# Altium PCB smartmcu_pcb.PcbDoc
Units mil, origin at the board's own origin, x right, y up, seen from the top; angles counter-clockwise.
Board outline 2104 x 1902 mil, 4 copper layers (Top Layer, GND_layer, 3.3V_layer, Bottom Layer), stack 23.756 mil thick; 89 components, 43 nets, 257 pads, 84 vias.
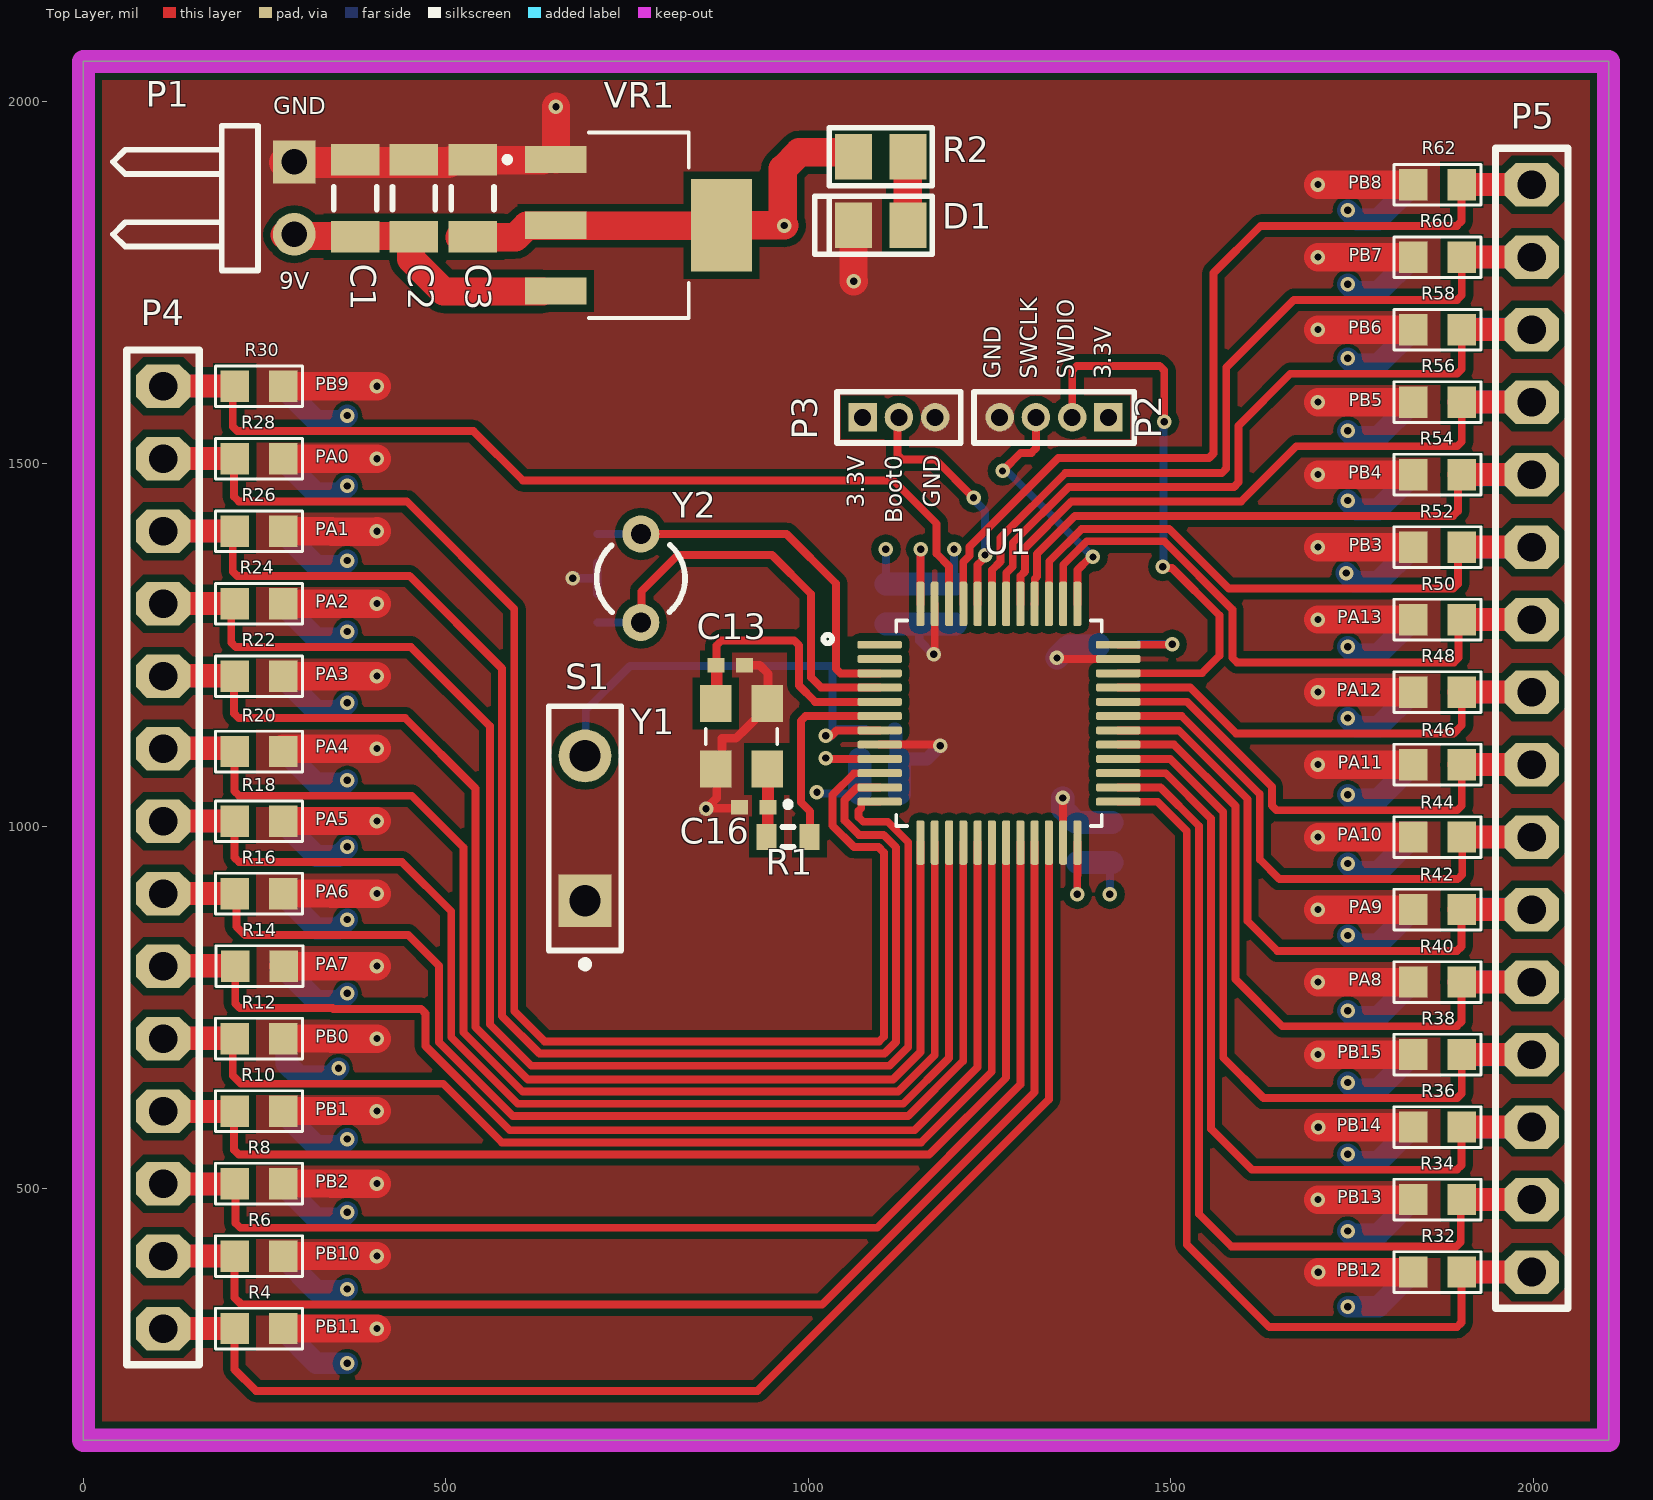
[diagram p0: Top Layer view]
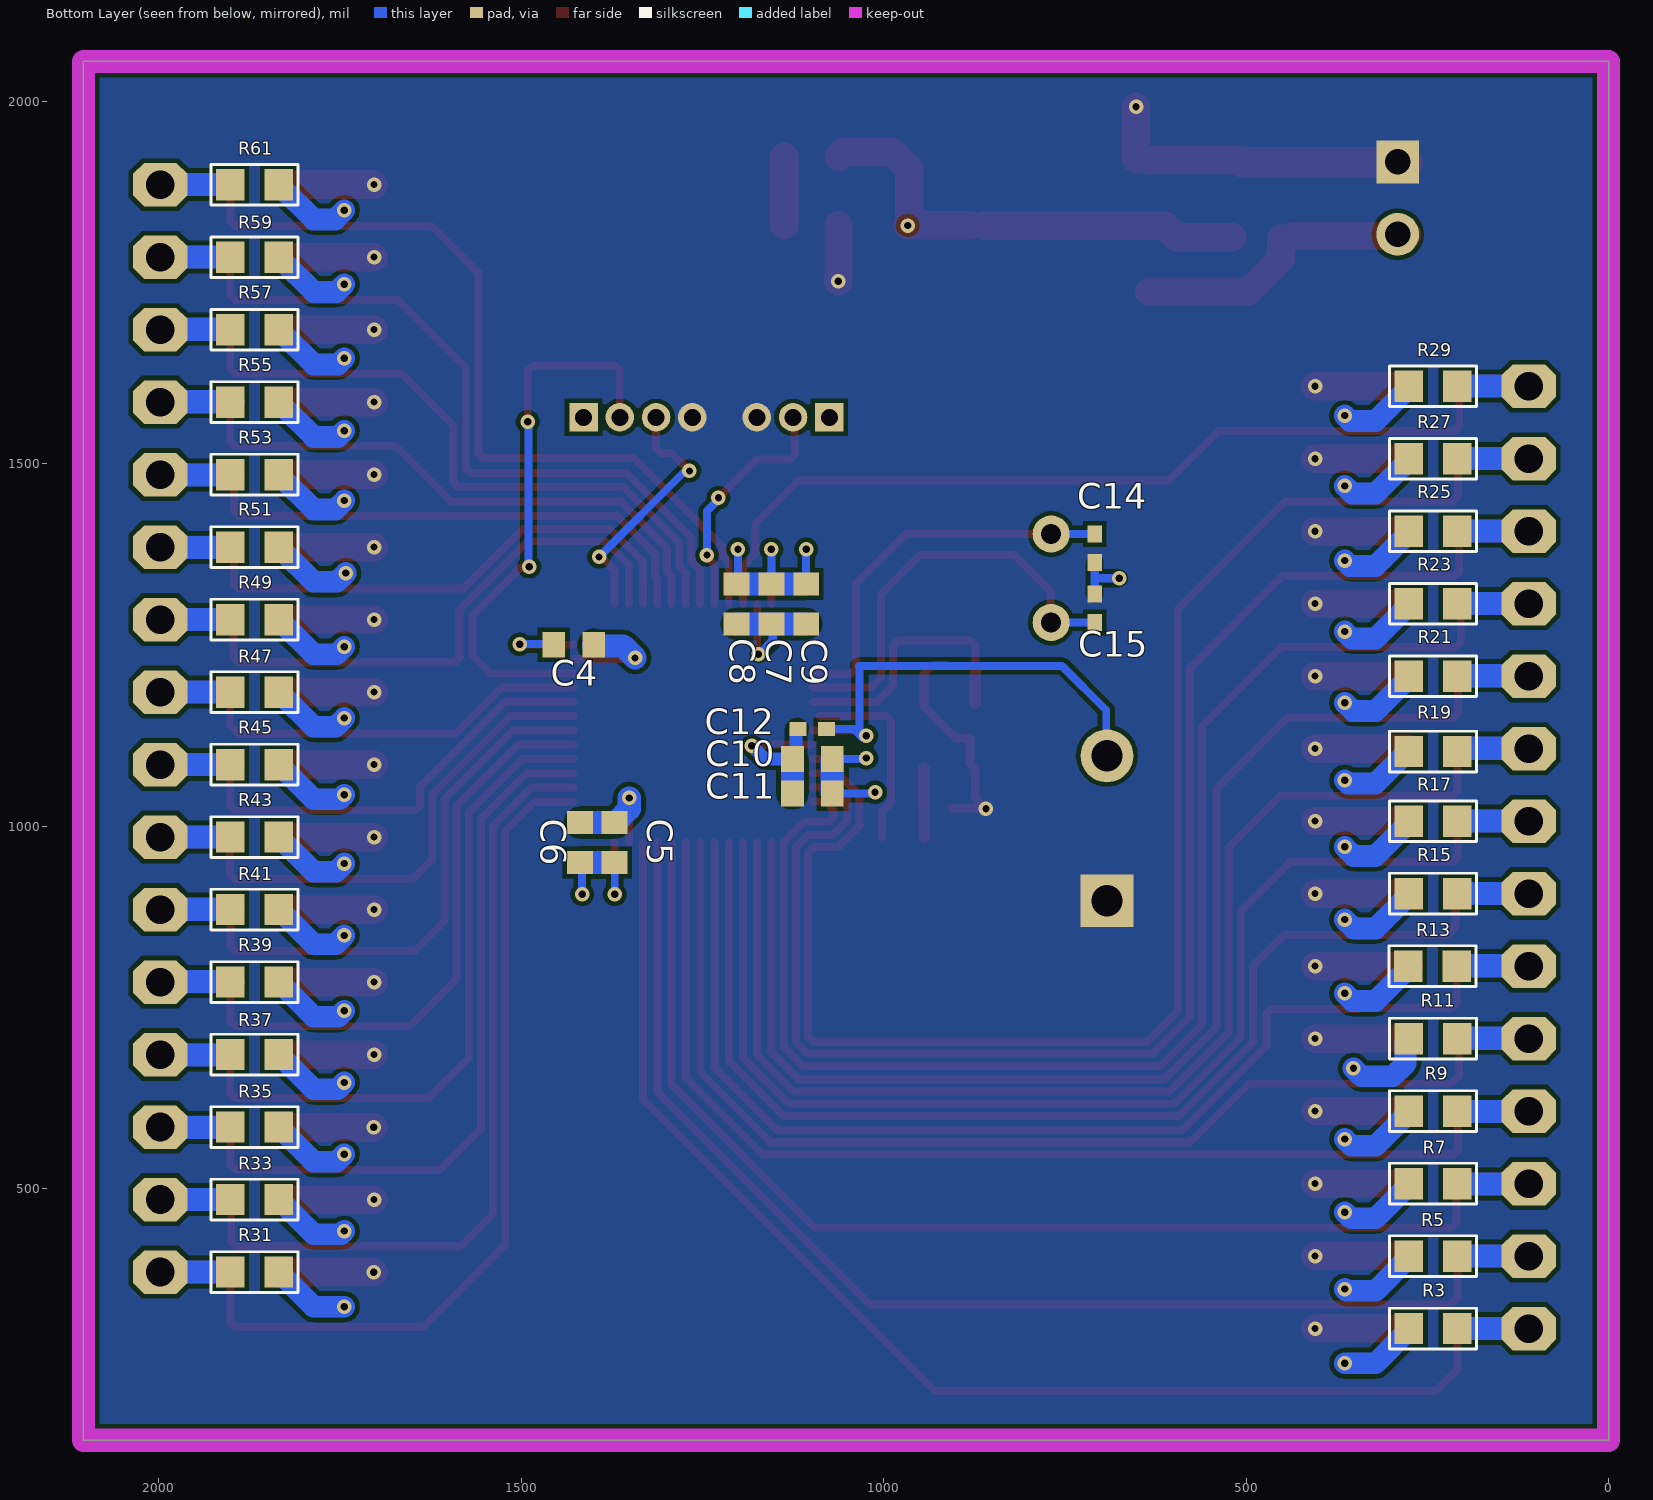
[diagram p1: Bottom Layer view, seen from below]
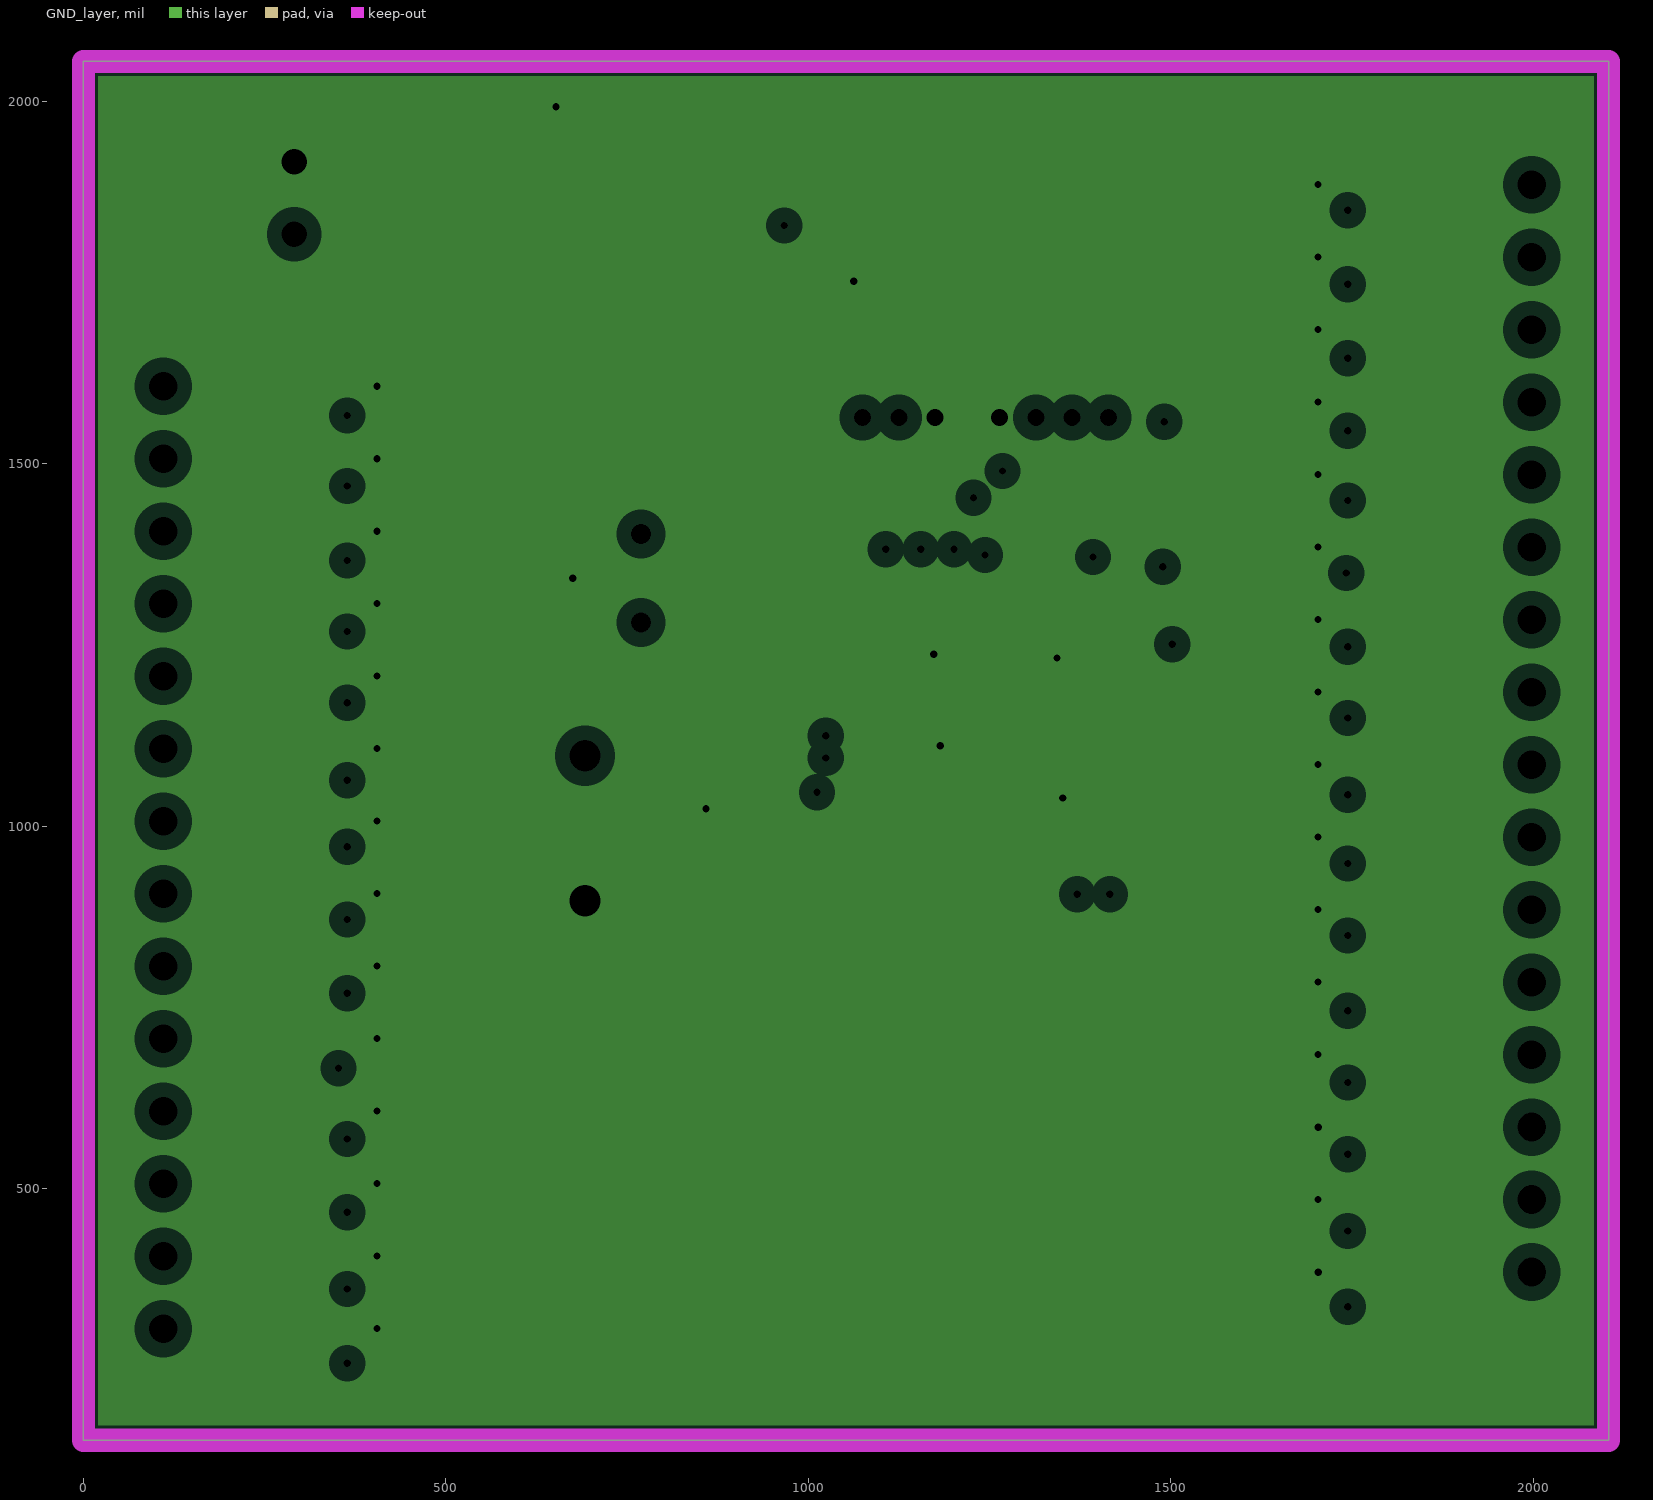
[diagram p2: GND_layer, clearances drawn from the general rule]
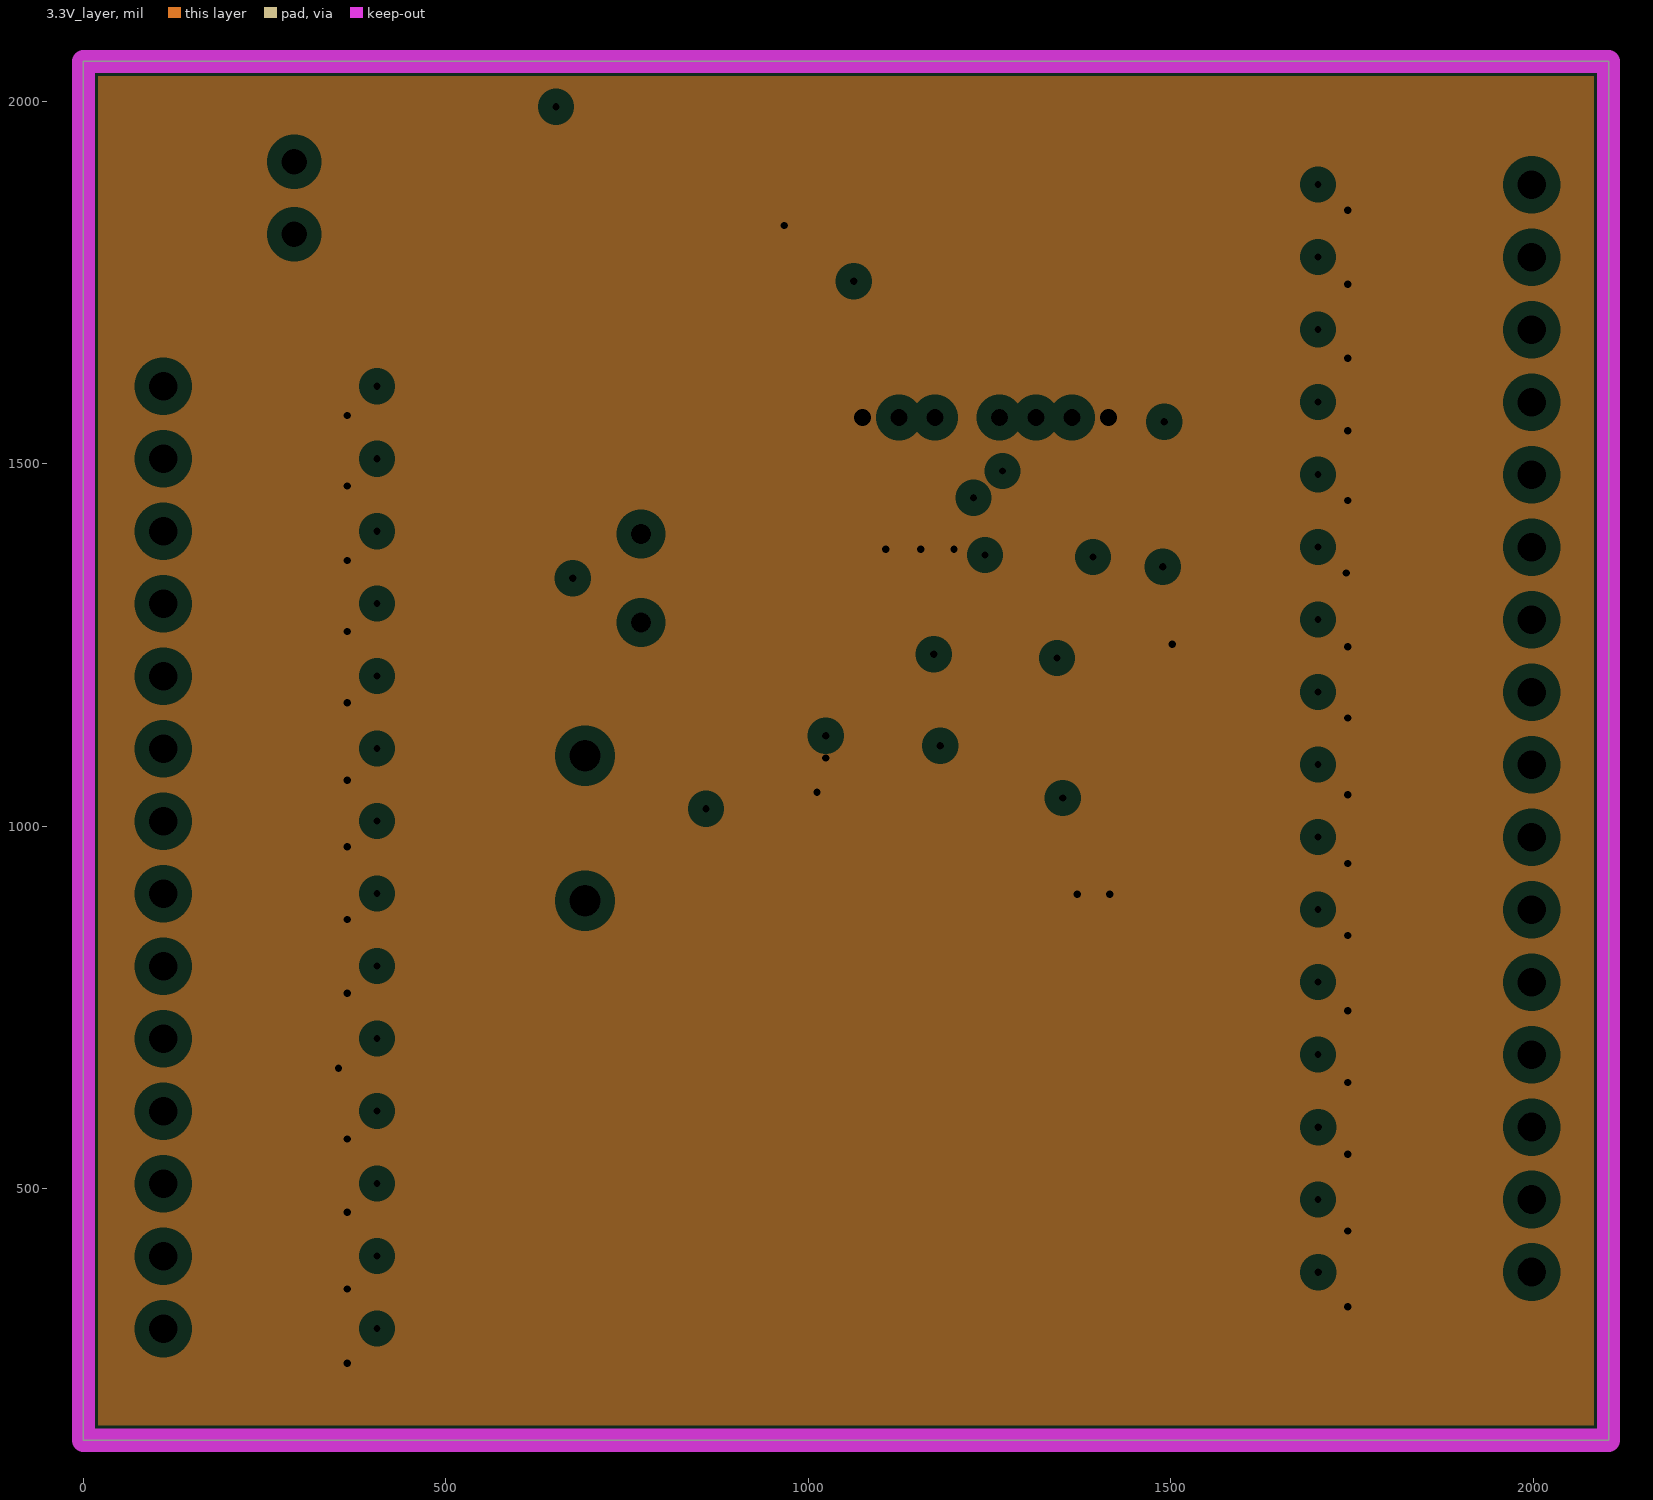
[diagram p3: 3.3V_layer, clearances drawn from the general rule]
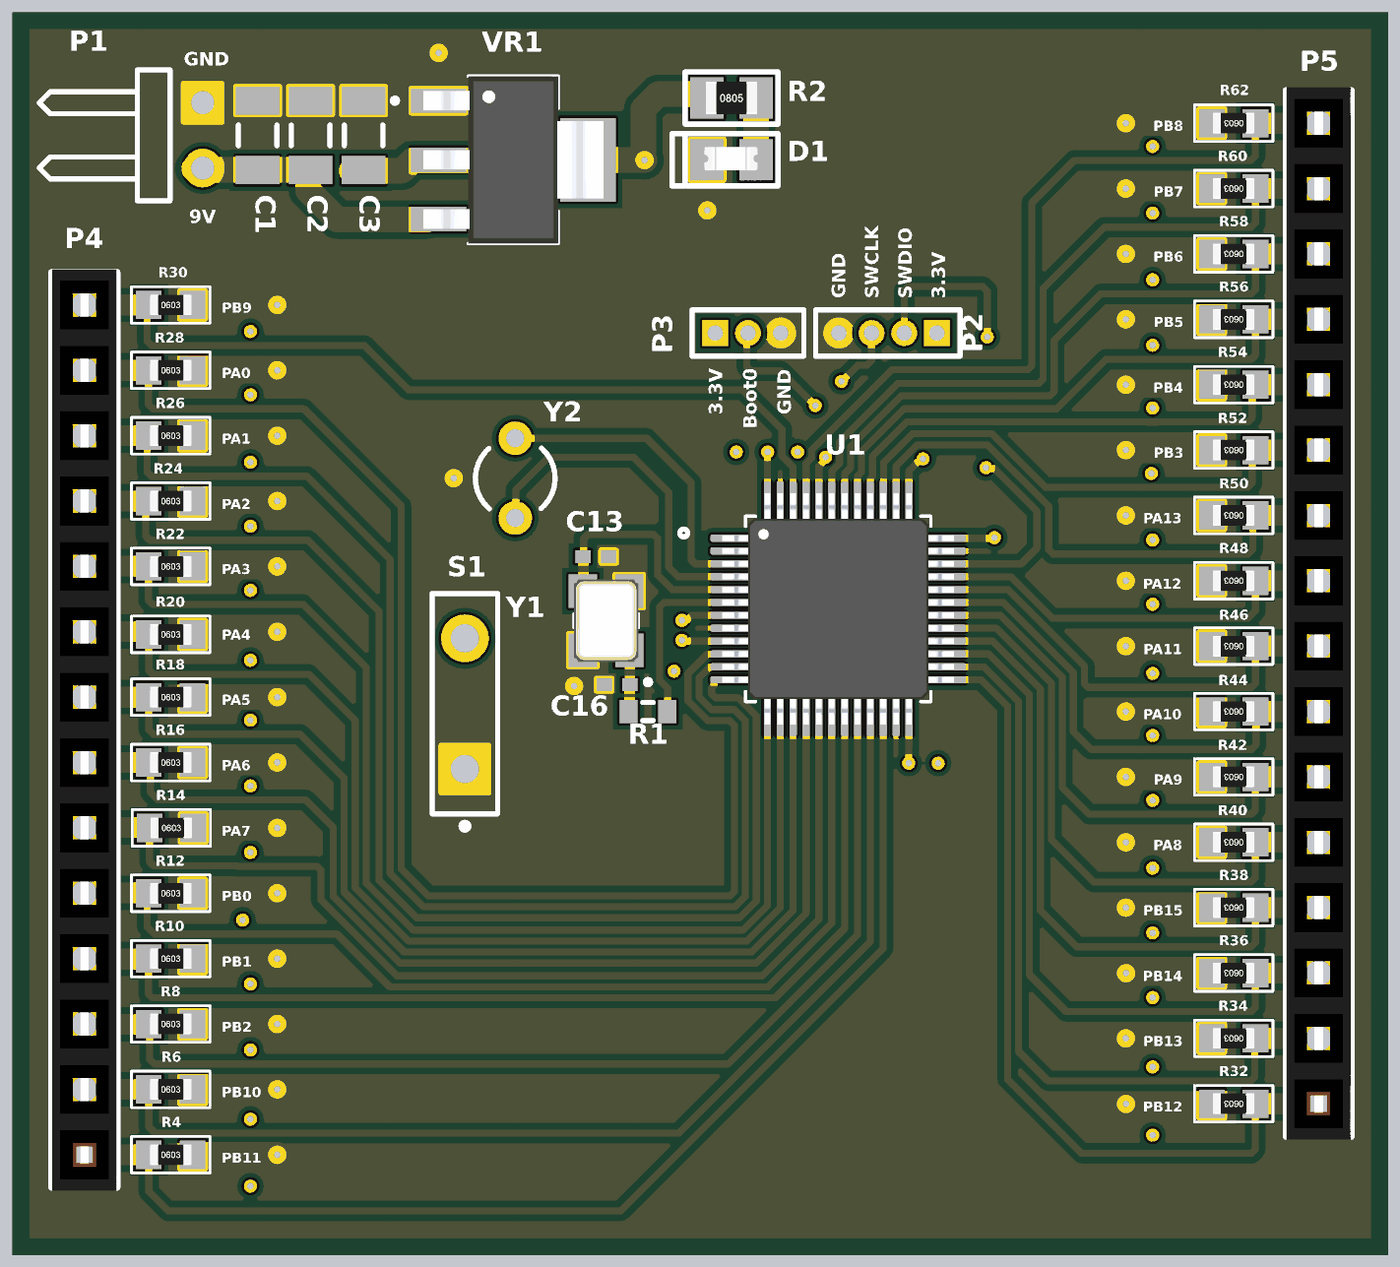
[diagram p4: 3D render of the assembled board from above, using the file's embedded part models]
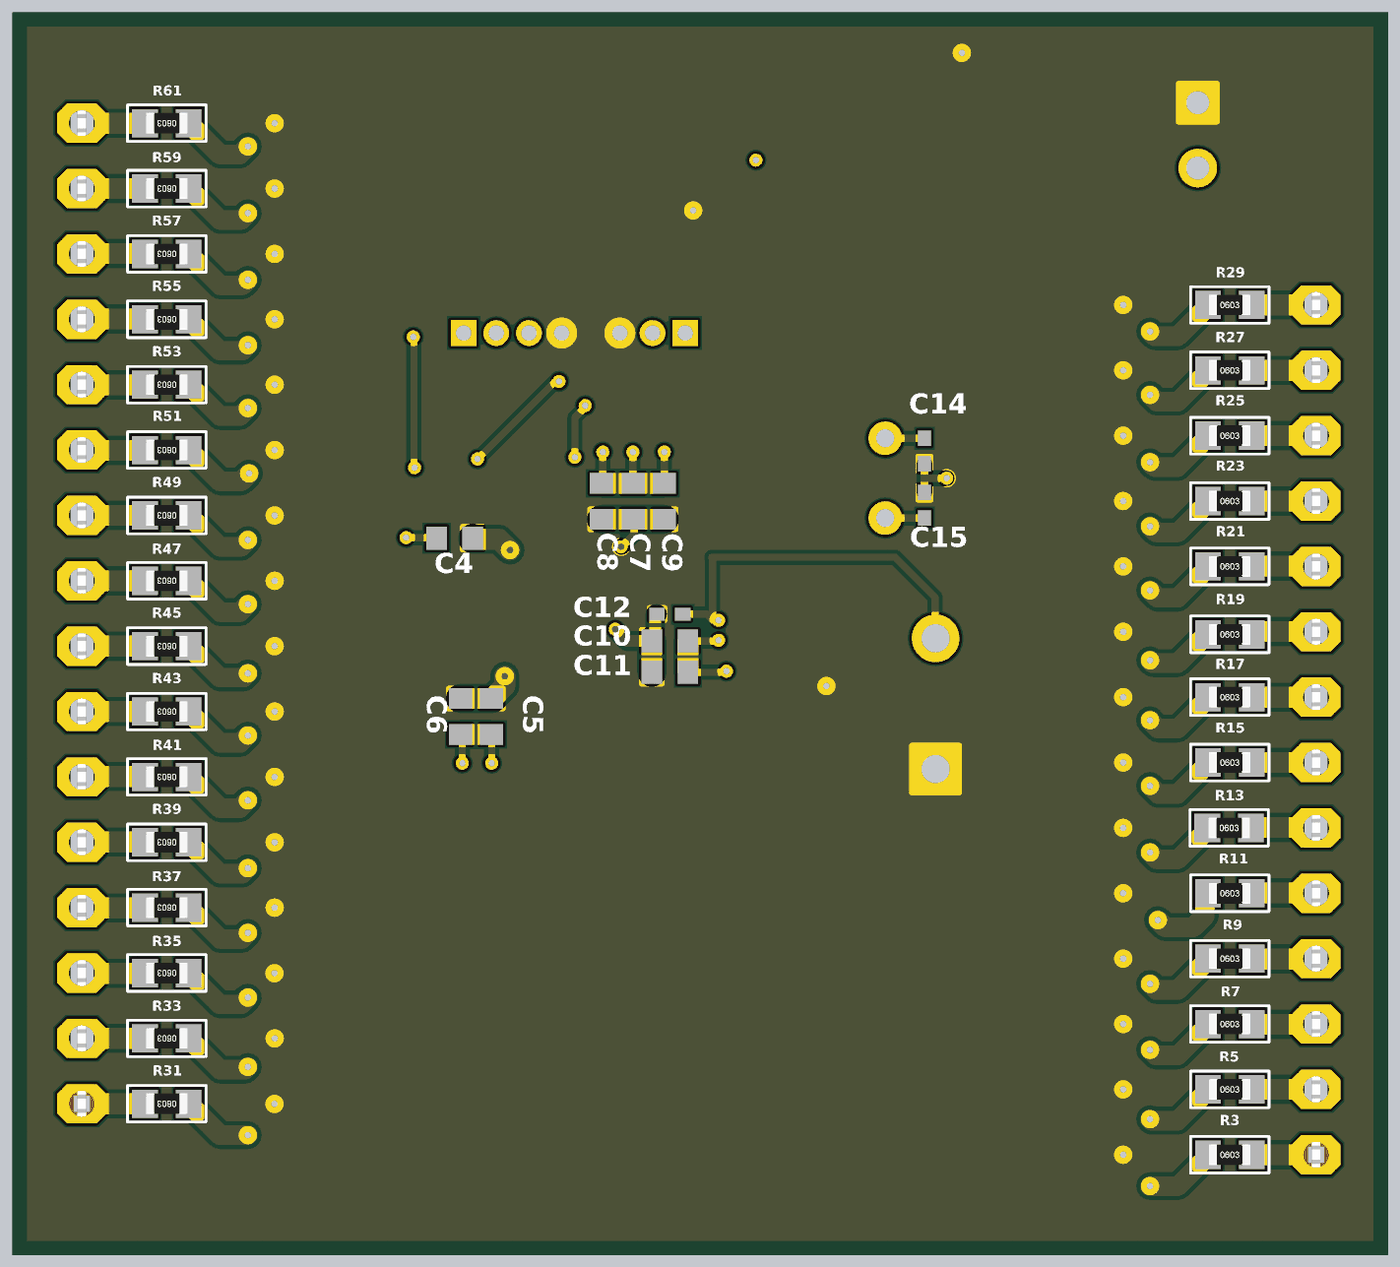
[diagram p5: 3D render of the assembled board from below, using the file's embedded part models]

## Layer stack, top to bottom
Top Solder: solder mask 0.4, Solder Resist, Dk 3.5
Top Layer: signal copper 1.4
Dielectric 2: prepreg 2.8, PP-006, Dk 4.1
GND_layer: plane copper 1.378, net GND1
Dielectric 1: dielectric 12.6, FR-4, Dk 4.8
3.3V_layer: plane copper 1.378, net +3.3V
Dielectric 3: prepreg 2.8, PP-006, Dk 4.1
Bottom Layer: signal copper 1.4
Bottom Solder: solder mask 0.4, Solder Resist, Dk 3.5

## Board outline
0,153 2104,153 2104,2055 0,2055

## Design rules (kind name [scope] priority, off if disabled: settings)
Clearance "toplayer polygon" [InNamedPolygon('GND1_L01_P000')] p1: gap=10 ignorepadtopadclearanceinfootprint=FALSE
Clearance [All] p2: gap=6 ignorepadtopadclearanceinfootprint=FALSE
MinimumSolderMaskSliver [All] p1: minsoldermaskwidth=2
PlaneClearance [All] p1: clearance=20
PlaneConnect [All] p1: planeconnectstyle=Direct reliefexpansion=20 reliefentries=4 reliefconductorwidth=10 reliefairgap=10
PolygonConnect [All] p1: connectstyle=Direct reliefconductorwidth=10 reliefentries=4 polygonreliefangle="90 Angle" airgapwidth=10
RoutingVias [All] p1: holewidth=10 width=20 viastyle="Through Hole" minholewidth=10 minwidth=20 maxholewidth=28 maxwidth=50
SilkToSilkClearance [All] p1: silktosilkclearance=2
SilkToSolderMaskClearance [IsPad] p1: minsilkscreentomaskgap=2 clearancetoexposedcopper=TRUE
SolderMaskExpansion [All] p1: expansion=4 istentingtop=FALSE
SupplyNets "Schematic Supply Nets_2" [InNet('+9V')] p1: voltage=0.000
SupplyNets "Schematic Supply Nets_1" [InNet('+3.3V')] p2: voltage=0.000
SupplyNets "Schematic Supply Nets" [InNet('GND1')] p3: voltage=0.000
Width [All] p1: maxlimit=43 minlimit=10 preferedwidth=10
25 further rules are at their usual default settings.

## Classes and differential pairs
component class MCU: C4 C5 C6 C7 C8 C9 C10 C11 C12 C13 C14 C15 C16 P2 P3 P4 P5 R1 R3 R4 R5 R6 R7 R8 R9 R10 R11 R12 R13 R14 R15 R16 R17 R18 R19 R20 R21 R22 R23 R24 R25 R26 R27 R28 R29 R30 R31 R32 R33 R34 R35 R36 R37 R38 R39 R40 R41 R42 R43 R44 R45 R46 R47 R48 R49 R50 R51 R52 R53 R54 R55 R56 R57 R58 R59 R60 R61 R62 S1 U1 VV Y1 Y2
component class main: C1 C2 C3 D1 P1 R2 VR1

## Components (designator, comment, footprint, x,y, rotation, side; value= is the part's Value field where it differs from the comment)
C1 "Cap Semi" C1206 375,1866.4 r270 top value=100nF
C2 "Cap Semi" C1206 456,1866.4 r270 top value=10uF
C3 "Cap Semi" C1206 537,1866.4 r270 top value=100uF
C4 "Cap Semi" 1608[0603] 1427.57,1250.27 r0 bottom value=100nF
C5 "Cap Semi" 1608[0603] 1371.27,977.43 r270 bottom value=100nF
C6 "Cap Semi" 1608[0603] 1419,977.43 r270 bottom value=100nF
C7 "Cap Semi" 1608[0603] 1154.73,1306.57 r90 bottom value=100nF
C8 "Cap Semi" 1608[0603] 1203,1306.57 r90 bottom value=100nF
C9 "Cap Semi" 1608[0603] 1107,1306.57 r90 bottom value=4.7uF
C10 "Cap Semi" 1608[0603] 1098.43,1092.79 r180 bottom value=10nF
C11 "Cap Semi" 1608[0603] 1098.43,1045 r180 bottom value=1uF
C12 "Cap Semi" 0402 1098.43,1134 r180 bottom value=10pF
C13 "Cap Semi" 0402 892.25,1222 r180 top value=10pF
C14 "Cap Semi" 0402 709,1383.34 r90 bottom value=10pF
C15 "Cap Semi" 0402 709,1300.66 r270 bottom value=10pF
C16 "Cap Semi" 0402 924.75,1026 r0 top value=10pF
D1 "LED" MY_LED_0805 1099.85,1832 r0 top
P1 "Header 2H" HDR1X2H 291,1916.4 r270 top
P2 "MHDR1X4" MHDR1X4 1414,1564 r180 top
P3 "MHDR1X3" MHDR1X3 1075,1564 r0 top
P4 "Header 14" MY_FE14 110,957 r90 top
P5 "Header 16" MY_FE16 1998,1135 r90 top
R1 "Res3" J1-0603 972,985 r180 top value=10R
R2 "330R" MY_0805 1099.85,1923.55 r0 top
R3 "1K" MY_0603 242,307 r180 bottom
R4 "1K" MY_0603 242,307 r0 top
R5 "1K" MY_0603 242,407 r180 bottom
R6 "1K" MY_0603 242,407 r0 top
R7 "1K" MY_0603 242,507 r180 bottom
R8 "1K" MY_0603 242,507 r0 top
R9 "1K" MY_0603 242,607 r180 bottom
R10 "1K" MY_0603 242,607 r0 top
R11 "1K" MY_0603 242,707 r180 bottom
R12 "1K" MY_0603 242,707 r0 top
R13 "1K" MY_0603 243,807 r180 bottom
R14 "1K" MY_0603 243,807 r0 top
R15 "1K" MY_0603 242,907 r180 bottom
R16 "1K" MY_0603 242,907 r0 top
R17 "1K" MY_0603 242,1007 r180 bottom
R18 "1K" MY_0603 242,1007 r0 top
R19 "1K" MY_0603 242,1103 r180 bottom
R20 "1K" MY_0603 242,1103 r0 top
R21 "1K" MY_0603 242,1207 r180 bottom
R22 "1K" MY_0603 242,1207 r0 top
R23 "1K" MY_0603 242,1307 r180 bottom
R24 "1K" MY_0603 242,1307 r0 top
R25 "1K" MY_0603 242,1407 r180 bottom
R26 "1K" MY_0603 242,1407 r0 top
R27 "1K" MY_0603 242,1507 r180 bottom
R28 "1K" MY_0603 242,1507 r0 top
R29 "1K" MY_0603 242,1607 r180 bottom
R30 "1K" MY_0603 242,1607 r0 top
R31 "1K" MY_0603 1868,385 r0 bottom
R32 "1K" MY_0603 1868,385 r180 top
R33 "1K" MY_0603 1868,485 r0 bottom
R34 "1K" MY_0603 1868,485 r180 top
R35 "1K" MY_0603 1868,585 r0 bottom
R36 "1K" MY_0603 1868,585 r180 top
R37 "1K" MY_0603 1868,685 r0 bottom
R38 "1K" MY_0603 1868,685 r180 top
R39 "1K" MY_0603 1868,785 r0 bottom
R40 "1K" MY_0603 1868,785 r180 top
R41 "1K" MY_0603 1868,885 r0 bottom
R42 "1K" MY_0603 1868,885 r180 top
R43 "1K" MY_0603 1868,985 r0 bottom
R44 "1K" MY_0603 1868,985 r180 top
R45 "1K" MY_0603 1868,1085 r0 bottom
R46 "1K" MY_0603 1868,1085 r180 top
R47 "1K" MY_0603 1868,1185 r0 bottom
R48 "1K" MY_0603 1868,1185 r180 top
R49 "1K" MY_0603 1868,1285 r0 bottom
R50 "1K" MY_0603 1868,1285 r180 top
R51 "1K" MY_0603 1868,1385 r0 bottom
R52 "1K" MY_0603 1868,1385 r180 top
R53 "1K" MY_0603 1868,1485 r0 bottom
R54 "1K" MY_0603 1868,1485 r180 top
R55 "1K" MY_0603 1868,1585 r0 bottom
R56 "1K" MY_0603 1868,1585 r180 top
R57 "1K" MY_0603 1868,1685 r0 bottom
R58 "1K" MY_0603 1868,1685 r180 top
R59 "1K" MY_0603 1868,1785 r0 bottom
R60 "1K" MY_0603 1868,1785 r180 top
R61 "1K" MY_0603 1868,1885 r0 bottom
R62 "1K" MY_0603 1868,1885 r180 top
S1 "SW-PB" SPST-2 692,997 r90 top
U1 "STM32F103C8T6" QFP50P900X900X160-48N 1263,1142 r0 top
VR1 "LM1117MPX-3.3" VREG_LM1117MPX-3.3 766,1829 r0 top
Y1 "ECS-80-10-33-CGN-TR3" XTAL_ECS-80-10-33-CGN-TR3 908,1124 r90 top
Y2 "XTAL" R38 769,1342 r0 top

## Footprints (in the part's own frame and the unit in brackets; to place one, negate y for a bottom-side part, rotate by r counter-clockwise, add the part's x,y. Pads: shape width x height; smd on the part's side, far side on the other; paste and mask are expansions set on the pad)
0402 [mm] "Chip Capacitor, Body 1.0x0.5mm, IPC High Density"
  rect 0.6x0.5 smd: 1(-0.5,0) 2(0.5,0)
  body extent -0.55,-0.3 0.55,0.3, height 1.3
1608[0603] [mm] "Chip Capacitor, Body 1.6x0.8mm, IPC High Density"
  rect 0.8x0.9 smd: 1(-0.7,0) 2(0.7,0)
  body extent -0.87,-0.48 0.87,0.48, height 1.3
C1206 [mm] "Chip Capacitor, Body 3.2x1.6mm, IPC High Density"
  rect 1.1x1.7 smd: 1(-1.35,0) 2(1.35,0)
  silkscreen extent -0.4,-0.75 0.4,0.75, body extent -1.7,-0.9 1.7,0.9, height 1.3
HDR1X2H [mm] "Connector; Header; 2 Position; Right Angle"
  rect 1.5x1.5 hole 0.9: 1(0,0)
  round 1.5 hole 0.9: 2(2.54,0)
  silkscreen extent -1.27,-6.35 3.81,-1.27
J1-0603 [mm] "Chip Resistor, Body 1.6x0.8mm, IPC High Density"
  rect 0.7x0.9 smd: 1(-0.75,0) 2(0.75,0)
  silkscreen extent -0.2,-0.35 0.2,0.35, body extent -0.85,-0.48 0.85,0.48, height 0.9
MHDR1X3 [mm] "Connector; Header; 3 Position"
  rect 1x1 hole 0.6: 1(0,0)
  round 1 hole 0.6: 2(1.27,0) 3(2.54,0)
  silkscreen extent -0.9,-0.9 3.44,0.9
MHDR1X4 [mm] "Connector; Header; 4 Position"
  rect 1x1 hole 0.6: 1(0,0)
  round 1 hole 0.6: 2(1.27,0) 3(2.54,0) 4(3.81,0)
  silkscreen extent -0.9,-0.9 4.71,0.9
MY_0603 [mm]
  rect 1x1.1 smd: 1(-0.85,0) 2(0.85,0)
  silkscreen extent -1.52,-0.71 1.52,0.71, body extent -0.8,-0.4 0.8,0.4, height 0.44
MY_0805 [mm]
  rect 1.3x1.6 smd: 1(-0.95,0) 2(0.95,0)
  silkscreen extent -1.8,-1.02 1.8,1.02, body extent -1,-0.62 1,0.63, height 0.59
MY_FE14 [mil]
  oct 60x75 hole 39.37: 1(-650,0) 2(-550,0) 3(-450,0) 4(-350,0) 5(-250,0) 6(-150,0) 7(-50,0) 8(50,0) 9(150,0) 10(250,0) 11(350,0) 12(450,0) 13(550,0) 14(650,0)
  silkscreen extent -700,-50 700,50, body extent -705,-49 705,49, height 335
MY_FE16 [mil]
  oct 60x75 hole 39.37: 1(-750,0) 2(-650,0) 3(-550,0) 4(-450,0) 5(-350,0) 6(-250,0) 7(-150,0) 8(-50,0) 9(50,0) 10(150,0) 11(250,0) 12(350,0) 13(450,0) 14(550,0) 15(650,0) 16(750,0)
  silkscreen extent -800,-50 800,50, body extent -805,-49 805,49, height 335
MY_LED_0805 [mm]
  rect 1.3x1.6 smd: A(0.95,-0.076) K(-0.95,-0.076)
  silkscreen extent -2.31,-1.09 1.8,0.94, body extent -1.06,-0.48 1.01,0.42, height 0.86
QFP50P900X900X160-48N [mm]
  rrect50% 1.56x0.28 smd: 1(-4.18,2.75) 2(-4.18,2.25) 3(-4.18,1.75) 4(-4.18,1.25) 5(-4.18,0.75) 6(-4.18,0.25) 7(-4.18,-0.25) 8(-4.18,-0.75) 9(-4.18,-1.25) 10(-4.18,-1.75) 11(-4.18,-2.25) 12(-4.18,-2.75) 25(4.18,-2.75) 26(4.18,-2.25) 27(4.18,-1.75) 28(4.18,-1.25) 29(4.18,-0.75) 30(4.18,-0.25) 31(4.18,0.25) 32(4.18,0.75) 33(4.18,1.25) 34(4.18,1.75) 35(4.18,2.25) 36(4.18,2.75)
  rrect50% 0.28x1.56 smd: 13(-2.75,-4.18) 14(-2.25,-4.18) 15(-1.75,-4.18) 16(-1.25,-4.18) 17(-0.75,-4.18) 18(-0.25,-4.18) 19(0.25,-4.18) 20(0.75,-4.18) 21(1.25,-4.18) 22(1.75,-4.18) 23(2.25,-4.18) 24(2.75,-4.18) 37(2.75,4.18) 38(2.25,4.18) 39(1.75,4.18) 40(1.25,4.18) 41(0.75,4.18) 42(0.25,4.18) 43(-0.25,4.18) 44(-0.75,4.18) 45(-1.25,4.18) 46(-1.75,4.18) 47(-2.25,4.18) 48(-2.75,4.18)
  silkscreen extent -6.15,-3.6 3.6,3.6, body extent -4.5,-4.5 4.5,4.5, height 1.6
R38 [mm] "Crystal, Thru-Hole; 2 Leads; Body 3.1 x 8.2 mm (Dia.xH)"
  round 1.3 hole 0.7: 1(0,1.55) 2(0,-1.55)
  silkscreen extent -1.55,-1.19 1.55,1.17
SPST-2 [mm] "Switch; 2 Leads"
  rect 1.85x1.85 hole 1.1: 1(-2.54,0)
  round 1.85 hole 1.1: 2(2.54,0)
  silkscreen extent -4.89,-1.27 4.28,1.27
VREG_LM1117MPX-3.3 [mm]
  rect 2.15x0.95 smd: 1(-2.9,2.3) 2(-2.9,0) 3(-2.9,-2.3)
  rect 2.15x3.25 smd: 4(2.9,0)
  silkscreen extent -4.7,-3.25 1.75,3.25, body extent -3.5,-3.25 3.5,3.25, height 1.8
XTAL_ECS-80-10-33-CGN-TR3 [mm]
  rect 1.3x1.1 smd: 1(-1.15,-0.9) 2(1.15,-0.9) 3(1.15,0.9) 4(-1.15,0.9)
  silkscreen extent -2.49,-1.73 0.27,1.25, body extent -1.6,-1.25 1.6,1.25, height 0.8

## Part data
C1 C2 C3 C4 C5 C6 C7 C8 C9 C10 C11 C12 C13 C14 C15 C16: "Capacitor (Semiconductor SIM Model)", LatestRevisionDate=29-May-2009, LatestRevisionNote="IPC-7351 Footprint Added.", PackageDescription="Chip Capacitor", PackageReference=C1206, Published=8-Jun-2000, Publisher="Altium Limited"
D1: "Typical INFRARED GaAs LED", ASiD Part Number=LED-AS
P1: "Header, 2-Pin, Right Angle", LatestRevisionDate=17-Jul-2002, LatestRevisionNote="Re-released for DXP Platform.", Publisher="Altium Limited"
P2: "Header, 4-Pin", LatestRevisionDate=17-Jul-2002, LatestRevisionNote="Re-released for DXP Platform.", Publisher="Altium Limited"
P3: "Header, 3-Pin", LatestRevisionDate=17-Jul-2002, LatestRevisionNote="Re-released for DXP Platform.", Publisher="Altium Limited"
P4: "Header, 14-Pin", ASiD Part Number="Header 14-AS"
P5: "Header, 16-Pin", ASiD Part Number="Header 16-AS"
R1: "Resistor", LatestRevisionDate=29-May-2009, LatestRevisionNote="IPC-7351 Footprint Added.", PackageDescription="Chip Resistor", PackageReference=J1-0603, Published=8-Jun-2000, Publisher="Altium Limited"
R2 R3 R4 R5 R6 R7 R8 R9 R10 R11 R12 R13 R14 R15 R16 R17 R18 R19 R20 R21 R22 R23 R24 R25 R26 R27 R28 R29 R30 R31 R32 R33 R34 R35 R36 R37 R38 R39 R40 R41 R42 R43 R44 R45 R46 R47 R48 R49 R50 R51 R52 R53 R54 R55 R56 R57 R58 R59 R60 R61 R62: library part Res, "Standard resistor", ASiD Part Number=Res-AS
S1: "Switch", LatestRevisionDate=17-Jul-2002, LatestRevisionNote="Re-released for DXP Platform.", PackageDescription="Switch; 2 Leads", PackageReference=SPST-2, Published=24-Mar-1999, Publisher="Altium Limited"
U1: "ARM® Cortex®-M3 STM32F1 Microcontroller IC 32-Bit 72MHz 64KB (64K x 8) FLASH 48-LQFP (7x7)", Package="LQFP-48 STMicroelectronics", Check_prices=https://www.snapeda.com/parts/STM32F103C8T6/STMicroelectronics/view-part/?ref=eda, MF=STMicroelectronics, MP=STM32F103C8T6, SnapEDA_Link=https://www.snapeda.com/parts/STM32F103C8T6/STMicroelectronics/view-part/?ref=snap
VR1: "800-mA 15-V linear voltage regulator", Package="SOT-223-4 Texas Instruments", Availability="In Stock", Check_prices=https://www.snapeda.com/parts/LM1117MPX-3.3/Texas+Instruments/view-part/?ref=eda, MF="Texas Instruments", MP=LM1117MPX-3.3, Price=None, Purchase-URL=https://pricing.snapeda.com/search/part/LM1117MPX-3.3/?ref=eda, SnapEDA_Link=https://www.snapeda.com/parts/LM1117MPX-3.3/Texas+Instruments/view-part/?ref=snap
Y1: Package=None, Availability=Unavailable, MP=ECS-80-10-33-CGN-TR3, Price=None
Y2: "Crystal Oscillator", LatestRevisionDate=17-Jul-2002, LatestRevisionNote="Re-released for DXP Platform.", PackageDescription="Crystal, Thru-Hole; 2 Leads; Body 3.1 x 8.2 mm (Dia.xH)", PackageReference=R38, Published=8-Jun-2000, Publisher="Altium Limited"

## Via types
v1: diameter 20, hole 10, Top Layer to Bottom Layer, 84 vias

## Nets (pads, with @x,y where several pads share a name; then routed paths per layer and width w, separated by ;. In a path a pad name is that pad's centre, name@x,y a point inside that pad or via, vN(x,y) a via of type N, cw(c..) or ccw(c..) an arc to the next point about the centre after c; other vN are vias at no path point)
32KHz_01: C14.2 U1.3 Y2.1 | length 542.9
  Top Layer w11: Y2.1@770,1403.02 969.98,1403.02 1038,1335 1038,1323 ; 1038,1328 1038,1323 ; U1.3 1044.44,1210.9 1038,1217.34 1038,1323
  Bottom Layer w11: C14.2 Y2.1 Y2.1@770,1403.02
32KHz_02: C15.2 U1.4 Y2.2 | length 596.2
  Top Layer w11: Y2.2@770,1280.98 770,1324 820,1374 950,1374 1004,1320 1004,1205 1017.79,1191.21 1027.79,1191.21 U1.4
  Bottom Layer w11: C15.2 Y2.2 Y2.2@770,1280.98
+3.3V: C3.2 C4.2 C5.2 C6.2 C7.2 C8.2 C9.2 C10.2 C11.2 P2.1 P3.1 R2.1 R3.1 R5.1 R7.1 R9.1 R11.1 R13.1 R15.1 R17.1 R19.1 R21.1 R23.1 R25.1 R27.1 R29.1 R31.1 R33.1 R35.1 R37.1 R39.1 R41.1 R43.1 R45.1 R47.1 R49.1 R51.1 R53.1 R55.1 R57.1 R59.1 R61.1 U1.9 U1.24 U1.36 U1.48 VR1.2 VR1.4 | length 4846.1
  Top Layer w11: v1@1027,1094 1028.2,1092.8 U1.9 ; U1.48 1154.74,1381.74 v1(1155,1382) ; v1(1371,906) 1371,932.5 1371.26,932.76 U1.24 ; U1.36 1501.28,1250.28 v1(1502,1251)
  Top Layer w39: C3.2@518.85,1812.4 595.91,1812.4 611.65,1828.15 VR1.4@862.02,1828.15 ; VR1.4 v1@966.4,1829 ; v1(966.85,1828.55) v1@966.4,1829 ; R2.1 1056.45,1929.55 987.7,1929.55 964.85,1906.71 964.85,1830.55 v1@966.4,1829
  Bottom Layer w11: v1(1011.89,1046.77) 1013.62,1045.05 1027.95,1045.05 1028,1045 C11.2 ; v1@1027,1094 1028.21,1092.79 C10.2 ; C9.2 v1@1107,1383 ; C7.2 1155,1334.39 v1(1155,1382) ; v1(1201,1382) 1201,1336.13 C8.2 ; v1(1371,906) 1371,949.61 C5.2 ; v1(1416,906) 1416,946.87 C6.2 ; C4.2 1455.86,1251 v1(1502,1251)
  Bottom Layer w30: R3.1 275.46,305.03 321.5,259 v1(364,259) ; R5.1@275.46,405.03 321.5,359 361.6,359 v1(364,361.4) ; R7.1@275.46,505.03 321.5,459 355.6,459 v1(364,467.4) ; R9.1@275.46,605.03 321.5,559 354.6,559 v1(364,568.4) ; R11.1 280.15,702.31 280.15,672.57 297.72,655 341,655 v1(352,666) ; R13.1@275.46,805.03 321.5,759 353.6,759 v1(364,769.4) ; R15.1@275.46,905.03 321.5,859 351.8,859 v1(364,871.2) ; R17.1@275.46,1005.03 321.5,959 351.8,959 364,971.2 v1(364,971.75) ; R19.1@275.46,1105.03 321.5,1059 359.6,1059 v1(364,1063.4) ; R21.1@275.46,1205.03 321.5,1159 352.6,1159 v1(364,1170.4) ; R23.1@275.46,1305.03 321.5,1259 354.6,1259 v1(364,1268.4) ; R25.1@275.46,1405.03 321.5,1359 356.6,1359 v1(364,1366.4) ; R27.1@275.46,1505.03 321.5,1459 353.6,1459 v1(364,1469.4) ; R29.1@275.46,1605.03 321.5,1559 356.6,1559 v1(364,1566.4) ; v1(1742.07,1349.2) 1754.27,1337 1786.5,1337 R51.1@1832.54,1383.03 ; v1(1744,337) 1786.5,337 R31.1@1832.54,383.03 ; v1(1744,441.4) 1748.4,437 1786.5,437 R33.1@1832.54,483.03 ; v1(1744,547.4) 1754.4,537 1786.5,537 R35.1@1832.54,583.03 ; v1(1744,646.4) 1753.4,637 1786.5,637 R37.1@1832.54,683.03 ; v1(1744,745.4) 1752.4,737 1786.5,737 R39.1@1832.54,783.03 ; v1(1744,849.2) 1756.2,837 1786.5,837 R41.1@1832.54,883.03 ; v1(1744,948.4) 1755.4,937 1786.5,937 R43.1@1832.54,983.03 ; v1(1744,1043.4) 1750.4,1037 1786.5,1037 R45.1@1832.54,1083.03 ; v1(1744,1149.2) 1756.2,1137 1786.5,1137 R47.1@1832.54,1183.03 ; v1(1744,1247.4) 1754.4,1237 1786.5,1237 R49.1@1832.54,1283.03 ; v1(1744,1449.2) 1756.2,1437 1786.5,1437 R53.1@1832.54,1483.03 ; v1(1744,1545.4) 1752.4,1537 1786.5,1537 R55.1@1832.54,1583.03 ; v1(1744,1645.4) 1752.4,1637 1786.5,1637 R57.1@1832.54,1683.03 ; v1(1744,1747.4) 1754.4,1737 1786.5,1737 R59.1@1832.54,1783.03 ; v1(1744,1849.5) 1756.5,1837 1786.5,1837 R61.1@1832.54,1883.03
  Bottom Layer w32: C11.2 C10.2 ; C9.2 C7.2 C8.2 ; C5.2 C6.2
  other v1: 1024,1094 1107,1382
+9V: C1.2 C2.2 P1.2 VR1.3 | length 389.5
  Top Layer w39: P1.2@277.85,1815.55 279.43,1813.98 436.28,1813.98 C2.2@437.85,1812.4 ; C2.2@451.82,1810.25 451.82,1782.6 496.82,1737.6 VR1.3@633.68,1737.6
BOOT0: P3.2 U1.44 | length 339.3
  Top Layer w10.8: P3.2 1123,1562 1123,1512.33 1129.33,1506 1175,1506 v1(1228,1453) ; U1.44 1233.47,1360.45 1239.2,1366.18 1239.2,1366.91 1243.8,1371.51 v1(1243.8,1374)
  Bottom Layer w10.8: v1(1228,1453) 1228,1450.51 1243.8,1434.71 v1(1243.8,1374)
GND1: C1.1 C2.1 C3.1 C4.1 C5.1 C6.1 C7.1 C8.1 C9.1 C10.1 C11.1 C12.1 C13.1 C14.1 C15.1 C16.1 D1.K P1.1 P2.4 P3.3 R4.2 R6.2 R8.2 R10.2 R12.2 R14.2 R16.2 R18.2 R20.2 R22.2 R24.2 R26.2 R28.2 R30.2 R32.2 R34.2 R36.2 R38.2 R40.2 R42.2 R44.2 R46.2 R48.2 R50.2 R52.2 R54.2 R56.2 R58.2 R60.2 R62.2 S1.1 U1.8 U1.23 U1.35 U1.47 VR1.1 Y1.2 Y1.4 | length 5553.8
  Top Layer w11: U1.8 1180.54,1112.46 v1(1182,1111) ; v1@1174.42,1238.42 U1.47 ; v1(1343,1232) 1344.42,1230.58 U1.35 ; v1(1351,1039) 1351.57,1038.43 U1.23
  Top Layer w11.8: v1(859,1024) v1@860,1025 ; C16.1 904.06,1025 v1@860,1025 ; C13.1@912.94,1222 933,1222 944.43,1210.57 944.43,1169.28 944.43,1165.34 908.09,1129 908,1129 900,1121 880.91,1121 880.91,1086.07 873.57,1078.72 873.57,1038.57 v1@860,1025 ; v1(1173,1237) v1@1174.42,1238.42
  Top Layer w39: R4.2 v1(405,307) ; R6.2 v1(405,407) ; R8.2 342.04,507 342.34,506.7 404.7,506.7 v1(405,507) ; R10.2 v1(405,607) ; R12.2 342.04,707 342.34,706.7 404.7,706.7 v1(405,707) ; R14.2@275.46,807 275.76,806.7 404.7,806.7 v1(405,807) ; R16.2 342.04,907 342.34,906.7 404.7,906.7 v1(405,907) ; R18.2 349.04,1007 349.3,1007.25 404.75,1007.25 v1(405,1007) ; R20.2@275.46,1107 275.76,1106.7 404.7,1106.7 v1(405,1107) ; R22.2 342.04,1207 342.34,1206.7 404.7,1206.7 v1(405,1207) ; R24.2 342.04,1307 342.34,1306.7 404.7,1306.7 v1(405,1307) ; R26.2 342.04,1407 342.94,1406.1 404.1,1406.1 v1(405,1407) ; R28.2 342.04,1507 342.34,1506.7 404.7,1506.7 v1(405,1507) ; R30.2 v1(405,1607) ; C3.1@503.89,1915.55 507.04,1918.7 VR1.1@633.68,1918.7 ; VR1.1 v1@651.83,1992.53 ; D1.K 1062.45,1751.95 v1(1062.85,1751.55) ; v1(1703,485) 1703.3,484.7 1832.24,484.7 R34.2@1832.54,485 ; v1(1703,685) 1703.3,684.7 1832.24,684.7 R38.2@1832.54,685 ; v1(1703,785) 1703.3,784.7 1832.24,784.7 R40.2@1832.54,785 ; v1(1703,885) 1703.3,884.7 1832.24,884.7 R42.2@1832.54,885 ; v1(1703,985) 1703.3,984.7 1832.24,984.7 R44.2@1832.54,985 ; v1(1703,1085) 1703.3,1084.7 1832.24,1084.7 R46.2@1832.54,1085 ; v1(1703,1185) 1703.3,1184.7 1832.24,1184.7 R48.2@1832.54,1185 ; v1(1703,1285) R50.2@1832.54,1285 ; v1(1703,1385) 1703.3,1384.7 1832.24,1384.7 R52.2@1832.54,1385 ; v1(1703,1485) 1703.3,1484.7 1832.24,1484.7 R54.2@1832.54,1485 ; v1(1703,1585) 1703.3,1584.7 1832.24,1584.7 R56.2@1832.54,1585 ; v1(1703,1685) 1703.3,1684.7 1832.24,1684.7 R58.2@1832.54,1685 ; v1(1703,1785) 1703.3,1784.7 1832.24,1784.7 R60.2@1832.54,1785 ; v1(1703,1885) R62.2@1832.54,1885 ; v1(1703.3,384.7) 1832.24,384.7 R32.2@1832.54,385 ; v1(1703.3,584.7) 1832.24,584.7 R36.2@1832.54,585
  Top Layer w43: P1.1@277.85,1915.55 C3.1@503.89,1915.55
  Bottom Layer w11.8: v1(675,1342) 709,1342 ; C15.1 709,1342 ; C14.1 709,1342 ; C7.1 1153,1277.28 1153,1256 1172,1237 v1(1173,1237)
  Bottom Layer w18: C12.1 1120.09,1134 1120.93,1133.16 1120.93,1097.85 C10.1 1163.91,1092.79 v1@1182,1110.87
  Bottom Layer w32: C9.1 C7.1 C8.1 ; C11.1 C10.1 ; v1(1343,1232) 1359.55,1248.55 1399.76,1248.55 1400.01,1248.8 C4.1 ; v1(1351,1039) 1351,1023.8 1369.8,1004.99 C5.1 C6.1
  other v1: 651.85,1992.55
IN/OUT: C16.2 R1.2 Y1.1 | length 95.6
  Top Layer w16: R1.2@943.47,985 943.95,985.48 943.95,1025.52 C16.2 944.43,1078.72 944.43,1079.43 Y1.1@945,1080
NetD1_A: D1.A R2.2 | length 94.6
  Top Layer w39: D1.A R2.2
NetR1_1: R1.1 U1.6 | length 266.7
  Top Layer w11: R1.1@1002.53,985 1002.53,1020.47 990,1033 990,1145.4 996.44,1151.84 U1.6@1088.43,1151.84
NRST: C12.2 S1.2 U1.7 | length 649.9
  Top Layer w11: v1@1029,1124.58 1031.44,1124.58 1039.01,1132.16 U1.7
  Bottom Layer w11: S1.2@693,1097 693,1160 754,1221 1034.34,1221 ; 1033.34,1216 1033.34,1128.93 1029,1124.58 1029,1124 1031.44,1124 1041.44,1134 C12.2
  other v1: 1024,1124.58
OUT/IN: C13.2 U1.5 Y1.3 | length 375.3
  Top Layer w11: C13.2@873.57,1222 873.57,1249.56 880.01,1256 980.56,1256 987,1249.56 987,1194 1009.47,1171.53 1019.47,1171.53 U1.5
  Top Layer w16: Y1.3@873.57,1169.28 C13.2@873.57,1222
PA0: P4.13 R27.2 R28.1 U1.10 | length 2442.4
  Top Layer w10.8: R28.1 208,1506.46 208,1454.33 214.33,1448 446,1448 594.36,1299.64 594.36,744.96 636.22,703.1 1097.89,703.1 1104.22,709.43 1104.22,963.78 1096.8,971.2 1063.04,971.2 1033.2,1001.04 1033.2,1042.99 1063.2,1072.99 1098.32,1072.99 U1.10
  Top Layer w32: P4.13 R28.1 ; P4.13 R28.1 ; P4.13 R28.1
  Bottom Layer w32: P4.13 R27.2
PA1: P4.12 R25.2 R26.1 U1.11 | length 2367.4
  Top Layer w10.8: R26.1 206,1404.46 206,1351.33 212.33,1345 450,1345 577.56,1217.44 577.56,738 629.26,686.3 1094.32,686.3 1105.06,686.3 1121.02,702.26 1121.02,713 1121.02,970.74 1103.76,988 1070,988 1050,1008 1050,1036.03 1067.28,1053.31 1098.32,1053.31 U1.11
  Top Layer w32: P4.12 R26.1 ; P4.12 R26.1 ; P4.12 R26.1
  Bottom Layer w32: P4.12 R25.2
PA2: P4.11 R23.2 R24.1 U1.12 | length 2290.4
  Top Layer w10.8: R24.1 204,1302.46 204,1253.33 210.33,1247 452,1247 560.76,1138.24 560.76,726.76 618.02,669.5 1112.02,669.5 1137.82,695.3 1137.82,977.7 1109.52,1006 1075.76,1006 1069.43,1012.33 1069.43,1021.27 1073.12,1024.97 1073.12,1033.62 1073.24,1033.73 U1.12
  Top Layer w32: P4.11 R24.1 ; P4.11 R24.1 ; P4.11 R24.1
  Bottom Layer w32: P4.11 R23.2
PA3: P4.10 R21.2 R22.1 U1.13 | length 2099.4
  Top Layer w10.8: R22.1 208,1206.46 208,1155.33 214.33,1149 444,1149 541,1052 541,722.76 613.16,650.6 1116.88,650.6 1154.73,688.46 U1.13
  Top Layer w32: P4.10@110.54,1207.54 R22.1@209.07,1207.54 ; P4.10@110.54,1207.54 R22.1@209.07,1207.54 ; P4.10@110.54,1207.54 R22.1@209.07,1207.54
  Bottom Layer w32: P4.10@109.47,1207.54 R21.2@208,1207.54
PA4: P4.9 R19.2 R20.1 U1.14 | length 2049.8
  Top Layer w10.8: R20.1 208.54,1048.33 214.86,1042 453,1042 524.2,970.8 524.2,715.8 606.2,633.8 1123.83,633.8 1174.42,684.38 U1.14
  Top Layer w32: P4.9@110.54,1107.54 R20.1@209.07,1107.54 ; P4.9@110.54,1107.54 R20.1@209.07,1107.54 ; P4.9@110.54,1107.54 R20.1@209.07,1107.54
  Bottom Layer w32: P4.9@109.47,1107.54 R19.2@208,1107.54
PA5: P4.8 R17.2 R18.1 U1.15 | length 1995.9
  Top Layer w10.8: R18.1 208.54,956.68 214.86,950.35 439.65,950.35 507.4,882.6 507.4,708.84 599.24,617 1130.79,617 1194.1,680.31 U1.15
  Top Layer w32: P4.8 R18.1 ; P4.8 R18.1 ; P4.8 R18.1
  Bottom Layer w32: P4.8 R17.2
PA6: P4.7 R15.2 R16.1 U1.16 | length 1946.1
  Top Layer w10.8: R16.1 211,904.54 211,861.65 222.85,849.8 448.2,849.8 490.6,807.4 490.6,701.88 592.28,600.2 1137.75,600.2 1213.79,676.24 U1.16
  Top Layer w32: P4.7 R16.1 ; P4.7 R16.1 ; P4.7 R16.1
  Bottom Layer w32: P4.7 R15.2
PA7: P4.6 R13.2 R14.1 U1.17 | length 1914.4
  Top Layer w10.8: R14.1 209.54,755.33 215.86,749 343.74,749 344.74,748 465.67,748 472,741.67 472,696.72 588.12,580.6 1146.6,580.6 1233.47,667.47 U1.17
  Top Layer w32: P4.6@110.54,807.54 R14.1@209.07,807.54 ; P4.6@110.54,807.54 R14.1@209.07,807.54 ; P4.6@110.54,807.54 R14.1@209.07,807.54
  Bottom Layer w32: P4.6@109.47,807.54 R13.2@208,807.54
PA8: P5.5 R39.2 R40.1 U1.29 | length 1028.9
  Top Layer w10.8: U1.29 1504.53,1112.47 1589.2,1027.8 1589.2,788.8 1654,724 1894.67,724 1901,730.33 1901,784.54 R40.1
  Top Layer w32: R40.1@1897.46,785 P5.5@1996,785
  Bottom Layer w32: R39.2@1897.93,785.54 P5.5@1996.46,785.54
PA9: P5.6 R41.2 R42.1 U1.30 | length 948.8
  Top Layer w10.8: U1.30 1511.08,1132.16 1606,1037.24 1606,869 1647,828 1734.94,828 1735.14,827.8 1894.67,827.8 1901,834.13 1901,884.54 R42.1
  Top Layer w32: R42.1@1897.46,885 P5.6@1996,885
  Bottom Layer w32: R41.2@1898.93,885.54 P5.6@1997.46,885.54
PA10: P5.7 R43.2 R44.1 U1.31 | length 871.9
  Top Layer w10.8: U1.31 1515.16,1151.84 1622.8,1044.2 1622.8,954.2 1650,927 1895.67,927 1902,933.33 1902,984.46 R44.1
  Top Layer w32: R44.1@1899.46,985 P5.7
  Bottom Layer w32: R43.2@1899.46,985 P5.7
PA11: P5.8 R45.2 R46.1 U1.32 | length 906
  Top Layer w10.8: U1.32 1522.47,1171.53 1639.6,1054.4 1639.6,1028.33 1645.93,1022 1895.14,1022 1901.46,1028.33 R46.1
  Top Layer w32: R46.1@1897.46,1085 P5.8@1996,1085 ; R46.1@1899.46,1085 P5.8
  Bottom Layer w32: R45.2@1899.46,1085 P5.8
PA12: P5.9 R47.2 R48.1 U1.33 | length 747.7
  Top Layer w10.8: U1.33 1526.79,1191.21 1590.2,1127.8 1889.94,1127.8 1901.46,1139.33 R48.1
  Top Layer w32: R48.1@1897.46,1185 P5.9@1996,1185
  Bottom Layer w32: R47.2@1899.46,1185 P5.9
PA13: P5.10 R49.2 R50.1 U1.38 | length 975.3
  Top Layer w10.8: U1.38 1351.58,1360.58 1384,1393 1491,1393 1585,1299 1585,1232.33 1591.33,1226 1890.67,1226 1897,1232.33 1897,1280.54 R50.1
  Top Layer w32: R50.1@1899.46,1285 P5.10
  Bottom Layer w32: R49.2@1899.46,1285 P5.10
PB0: P4.5 R11.2 R12.1 U1.18 | length 1691.1
  Top Layer w10.8: R12.1 206,704.46 206,656 217.4,644.6 496.4,644.6 577.2,563.8 1155.8,563.8 1253.16,661.16 U1.18
  Top Layer w32: P4.5@110.54,707.54 R12.1@209.07,707.54
  Bottom Layer w32: P4.5@108.47,707.54 R11.2@207,707.54
PB1: P4.4 R9.2 R10.1 U1.19 | length 1883.7
  Top Layer w10.8: R10.1 208,606.46 208,553.33 214.33,547 1166.68,547 1272.84,653.16 U1.19
  Top Layer w32: P4.4@109.46,606.46 R10.1@208,606.46 ; P4.4@109.46,606.46 R10.1@208,606.46 ; P4.4@109.46,606.46 R10.1@208,606.46
  Bottom Layer w32: P4.4@110.54,606.46 R9.2@209.07,606.46
PB2: P4.3 R7.2 R8.1 U1.20 | length 1950.3
  Top Layer w10.8: R8.1 210,505.54 210,452.33 216.33,446 1095,446 1292.53,643.53 U1.20
  Top Layer w32: P4.3@109.46,506.46 R8.1@208,506.46 ; P4.3@109.46,506.46 R8.1@208,506.46 ; P4.3@109.46,506.46 R8.1@208,506.46
  Bottom Layer w32: P4.3@110.54,506.46 R7.2@209.07,506.46
PB3: P5.11 R51.2 R52.1 U1.39 | length 928
  Top Layer w10.8: U1.39 1332.01,1306.68 1332.01,1336.91 1332.4,1337.3 1332.4,1365.4 1377,1410 1497.76,1410 1569.88,1337.88 1579.96,1327.8 1889.67,1327.8 1896,1334.13 1896,1379.54 R52.1
  Top Layer w32: R52.1@1899.46,1385 P5.11
  Bottom Layer w32: R51.2@1900,1384.46 P5.11@1998.54,1384.46
PB4: P5.12 R53.2 R54.1 U1.40 | length 925.3
  Top Layer w10.8: U1.40 1312.32,1306.68 1312.32,1340.98 1315.6,1344.26 1315.6,1375.6 1368,1428 1734.94,1428 1735.14,1427.8 1752.86,1427.8 1753.06,1428 1889.67,1428 1896,1434.33 1896,1479.54 R54.1
  Top Layer w32: R54.1@1897.46,1485 P5.12@1996,1485
  Bottom Layer w32: R53.2@1900,1484.46 P5.12@1998.54,1484.46
PB5: P5.13 R55.2 R56.1 U1.41 | length 994.9
  Top Layer w10.8: U1.41 1292.53,1344.95 1298.8,1351.22 1298.8,1383.8 1363,1448 1597.2,1448 1673.2,1524 1895.14,1524 1901.46,1530.33 R56.1
  Top Layer w32: R56.1@1897.46,1585 P5.13@1996,1585
  Bottom Layer w32: R55.2@1897.93,1585.54 P5.13@1996.46,1585.54
PB6: P5.14 R57.2 R58.1 U1.42 | length 1104.2
  Top Layer w10.8: U1.42 1272.95,1306.68 1272.95,1349.13 1282,1358.18 1282,1390.76 1359.24,1468 1587.11,1468 1593.44,1474.33 1593.44,1552.44 1665,1624 1895.14,1624 1901.46,1630.33 R58.1
  Top Layer w32: R58.1@1899.46,1685 P5.14
  Bottom Layer w32: R57.2@1898.93,1685.54 P5.14@1997.46,1685.54
PB7: P5.15 R59.2 R60.1 U1.43 | length 1202.4
  Top Layer w10.8: U1.43 1253.27,1306.68 1253.27,1353.21 1265.2,1365.14 1265.2,1397.72 1354.48,1487 1570.31,1487 1576.64,1493.33 1576.64,1632.64 1670,1726 1895.14,1726 1901.46,1732.33 R60.1
  Top Layer w32: R60.1@1899.46,1785 P5.15
  Bottom Layer w32: R59.2@1899.46,1785 P5.15
PB8: P5.16 R61.2 R62.1 U1.45 | length 1340.6
  Top Layer w10.8: U1.45 1213.79,1364.52 1222.4,1373.14 1222.4,1385.4 1344.8,1507.8 1552.67,1507.8 1559,1514.13 1559,1763 1624.1,1828.1 1894.67,1828.1 1901,1834.43 1901,1884.54 R62.1
  Top Layer w32: R62.1@1899.46,1885 P5.16
  Bottom Layer w32: R61.2@1899.46,1885 P5.16
PB9: P4.14 R29.2 R30.1 U1.46 | length 1595
  Top Layer w10.8: R30.1 206,1604.46 206,1551.33 212.33,1545 538,1545 606,1477 1117,1477 1177,1417 1177,1375.74 1194.1,1358.63 U1.46
  Top Layer w32: P4.14 R30.1 ; P4.14 R30.1 ; P4.14 R30.1
  Bottom Layer w32: P4.14 R29.2
PB10: P4.2 R5.2 R6.1 U1.21 | length 2024.9
  Top Layer w10.8: R6.1 208.54,349.54 218.02,340.05 299.87,340.05 299.92,340 1019,340 1312.21,633.21 U1.21
  Top Layer w32: P4.2 R6.1 ; P4.2 R6.1 ; P4.2 R6.1
  Bottom Layer w32: P4.2 R5.2
PB11: P4.1 R3.2 R4.1 U1.22 | length 2107.3
  Top Layer w10.8: R4.1 208.54,250.46 238,221 930,221 1331.9,622.9 U1.22
  Top Layer w32: P4.1 R4.1 ; P4.1 R4.1 ; P4.1 R4.1
  Bottom Layer w32: P4.1 R3.2
PB12: P5.1 R31.2 R32.1 U1.25 | length 1377.4
  Top Layer w10.8: U1.25 1481.73,1033.73 1522,993.46 1522,423 1636,309 1894.67,309 1901,315.33 1901,384.54 R32.1
  Top Layer w32: R32.1@1899.46,385 P5.1
  Bottom Layer w32: R31.2@1899.46,385 P5.1
PB13: P5.2 R33.2 R34.1 U1.26 | length 1307.3
  Top Layer w10.8: U1.26 1485.81,1053.42 1538.8,1000.42 1538.8,465.2 1584,420 1873.27,420 1893.67,420 1900,426.33 1900,483.54 R34.1
  Top Layer w32: R34.1@1899.46,485 P5.2
  Bottom Layer w32: R33.2@1899.46,485 P5.2
PB14: P5.3 R35.2 R36.1 U1.27 | length 1203.3
  Top Layer w10.8: U1.27 1492.9,1073.1 1555.6,1010.4 1555.6,582.4 1612,526 1894.67,526 1901,532.33 1901,584.54 R36.1
  Top Layer w32: R36.1 P5.3@2000,585
  Bottom Layer w32: R35.2@1900,584.46 P5.3@1998.54,584.46
PB15: P5.4 R37.2 R38.1 U1.28 | length 1119.6
  Top Layer w10.8: U1.28 1499.21,1092.79 1572.4,1019.6 1572.4,680.6 1628,625 1895.14,625 1901.46,631.33 R38.1
  Top Layer w32: R38.1 P5.4@2000,685
  Bottom Layer w32: R37.2@1900,684.46 P5.4@1998.54,684.46
SWCLK: P2.3 U1.37 | length 351
  Top Layer w10.8: v1(1268,1490) 1293,1515 1307.67,1515 1314,1521.33 P2.3 ; U1.37 1371.27,1353.27 1387.61,1369.61 1390.87,1369.61 v1(1392.63,1371.37)
  Bottom Layer w10.8: v1(1268,1490) 1269.76,1488.24 1275.76,1488.24 v1(1392.63,1371.37)
SWDIO: P2.2 U1.34 | length 779.6
  Top Layer w10.8: P2.2 1364,1628.67 1370.33,1635 1484.67,1635 1491,1628.67 v1(1491,1558) ; U1.34 1542.9,1210.9 1567,1235 1567,1291 1501.76,1356.24 1490.76,1356.24 v1(1489,1358)
  Bottom Layer w10.8: v1(1489,1358) 1490,1359 1490,1557 v1(1491,1558)
pads on no net: U1.1 U1.2

## Polygon pours and split planes (outlines as drawn)
GND1 on Bottom Layer "GND1_L04_P002" (solid, remove dead copper, pour order 2): 0,153 2104,153 2104,2055 0,2055
GND1 on Top Layer "GND1_L01_P000" (solid, remove dead copper, pour order 0): 0,153 2104,153 2104,2055 0,2055
GND1 on GND_layer (split plane): 2083.9,173.1 20.1,173.1 20.1,2034.9 2083.9,2034.9
+3.3V on 3.3V_layer (split plane): 2083.9,173.1 20.1,173.1 20.1,2034.9 2083.9,2034.9

## Keep-outs
Keep-Out Layer:
  lines w32: 0,153 2104,153 2104,2055 0,2055 0,225 0,153

## Silkscreen, mask and mechanical layers (free items; w line width, h text height)
Top Overlay:
  text "GND" at 262,1973.51 h40
  text "PB8" at 1745,1873.41 h30
  text "PB7" at 1745.35,1773 h30
  text "9V" at 270,1732.47 h40
  text "PB6" at 1745.06,1673.38 h30
  text "GND" at 1273.49,1617 h40 r90
  text "SWCLK" at 1324.44,1617 h40 r90
  text "SWDIO" at 1375.47,1617 h40 r90
  text "3.3V" at 1426.49,1617 h40 r90
  text "PB9" at 320,1595.35 h30
  text "PB5" at 1745.35,1573.38 h30
  text "PA0" at 320,1495.38 h30
  text "PB4" at 1744.77,1473.06 h30
  text "3.3V" at 1085.49,1439 h40 r90
  text "GND" at 1190.49,1439.39 h40 r90
  text "Boot0" at 1138.03,1417.82 h40 r90
  text "PA1" at 320,1395 h30
  text "PB3" at 1745.41,1373.38 h30
  text "PA2" at 320,1295 h30
  text "PA13" at 1729.67,1273.38 h30
  text "PA3" at 320,1195.38 h30
  text "PA12" at 1729.2,1173 h30
  text "PA4" at 320,1095.06 h30
  text "PA11" at 1730.02,1073 h30
  text "PA5" at 320,995.38 h30
  text "PA10" at 1729.44,973.38 h30
  text "PA6" at 320,895.38 h30
  text "PA9" at 1745.47,873.35 h30
  text "PA7" at 320,795 h30
  text "PA8" at 1745.03,773.41 h30
  text "PB0" at 320,695.38 h30
  text "PB15" at 1729.58,673.38 h30
  text "PB1" at 320,595 h30
  text "PB14" at 1729,573.06 h30
  text "PB2" at 320,495 h30
  text "PB13" at 1729.64,473.38 h30
  text "PB10" at 320,395.38 h30
  text "PB12" at 1729.18,373 h30
  text "PB11" at 320,295 h30

## Dimensions
2104,2055 to 2104,153 on Mechanical 15
0,153 to 2104,153 on Mechanical 15